# EAGLE board frankfurt_eth_rev_A (EAGLE 6.6.0)
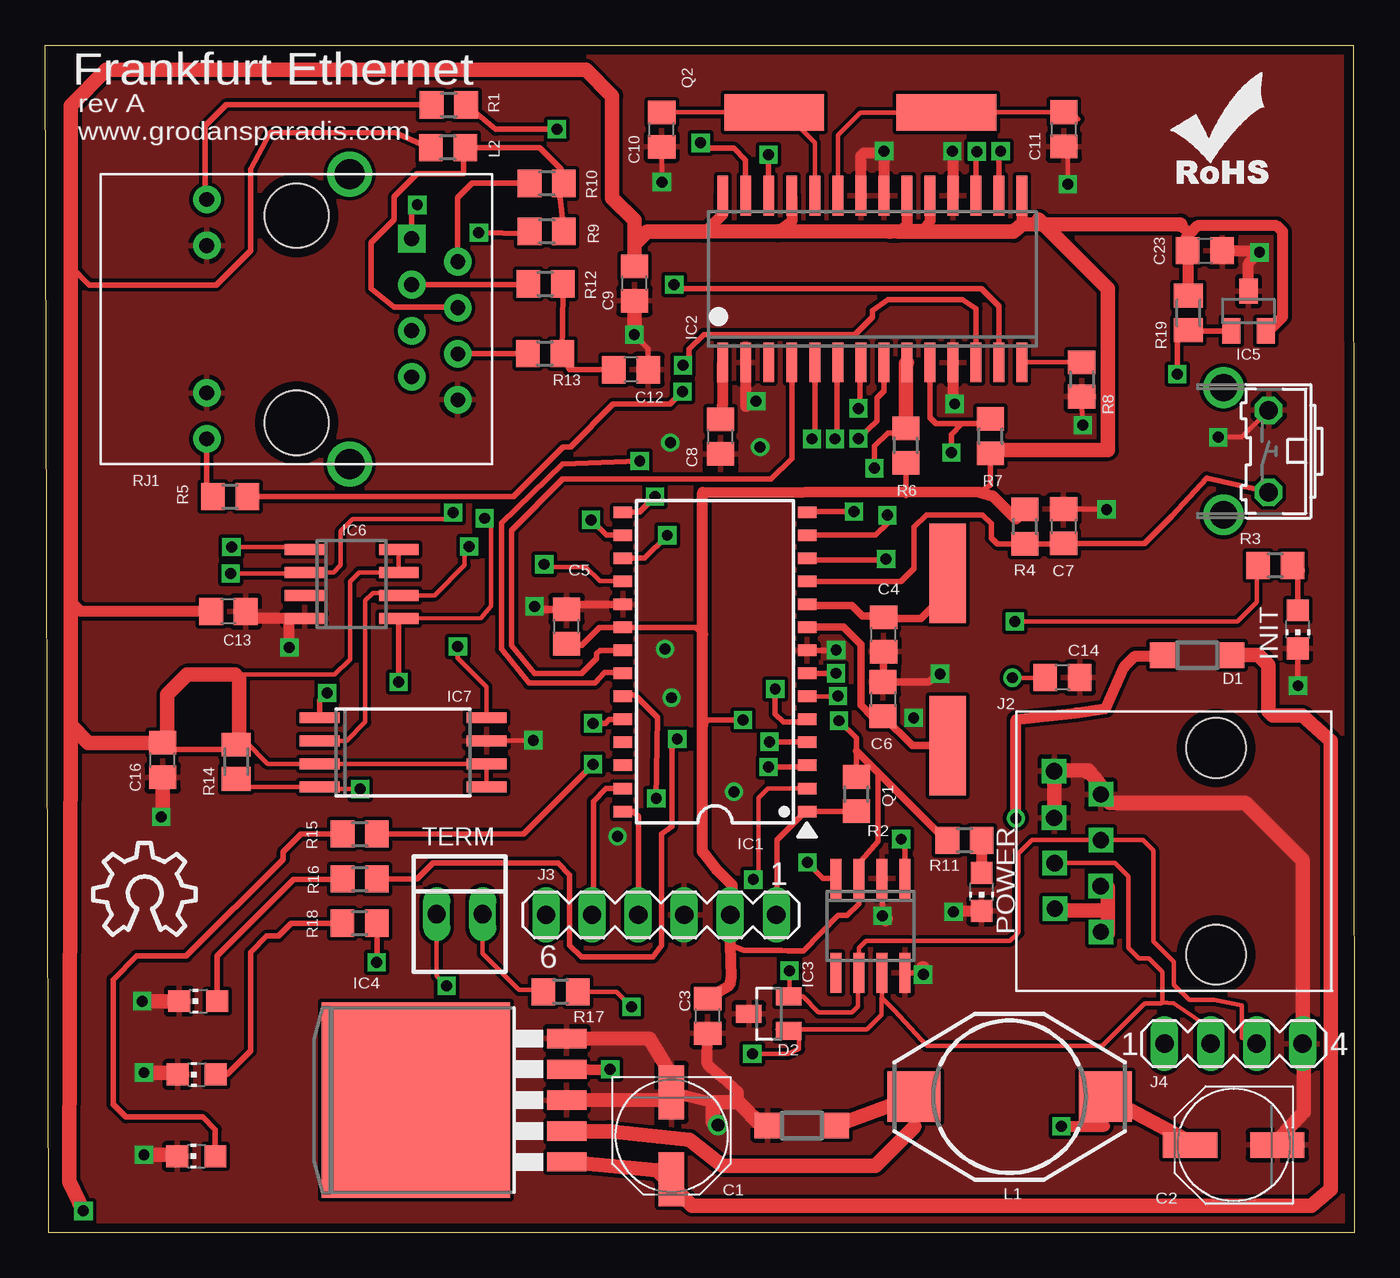
[diagram p0: board, top side]
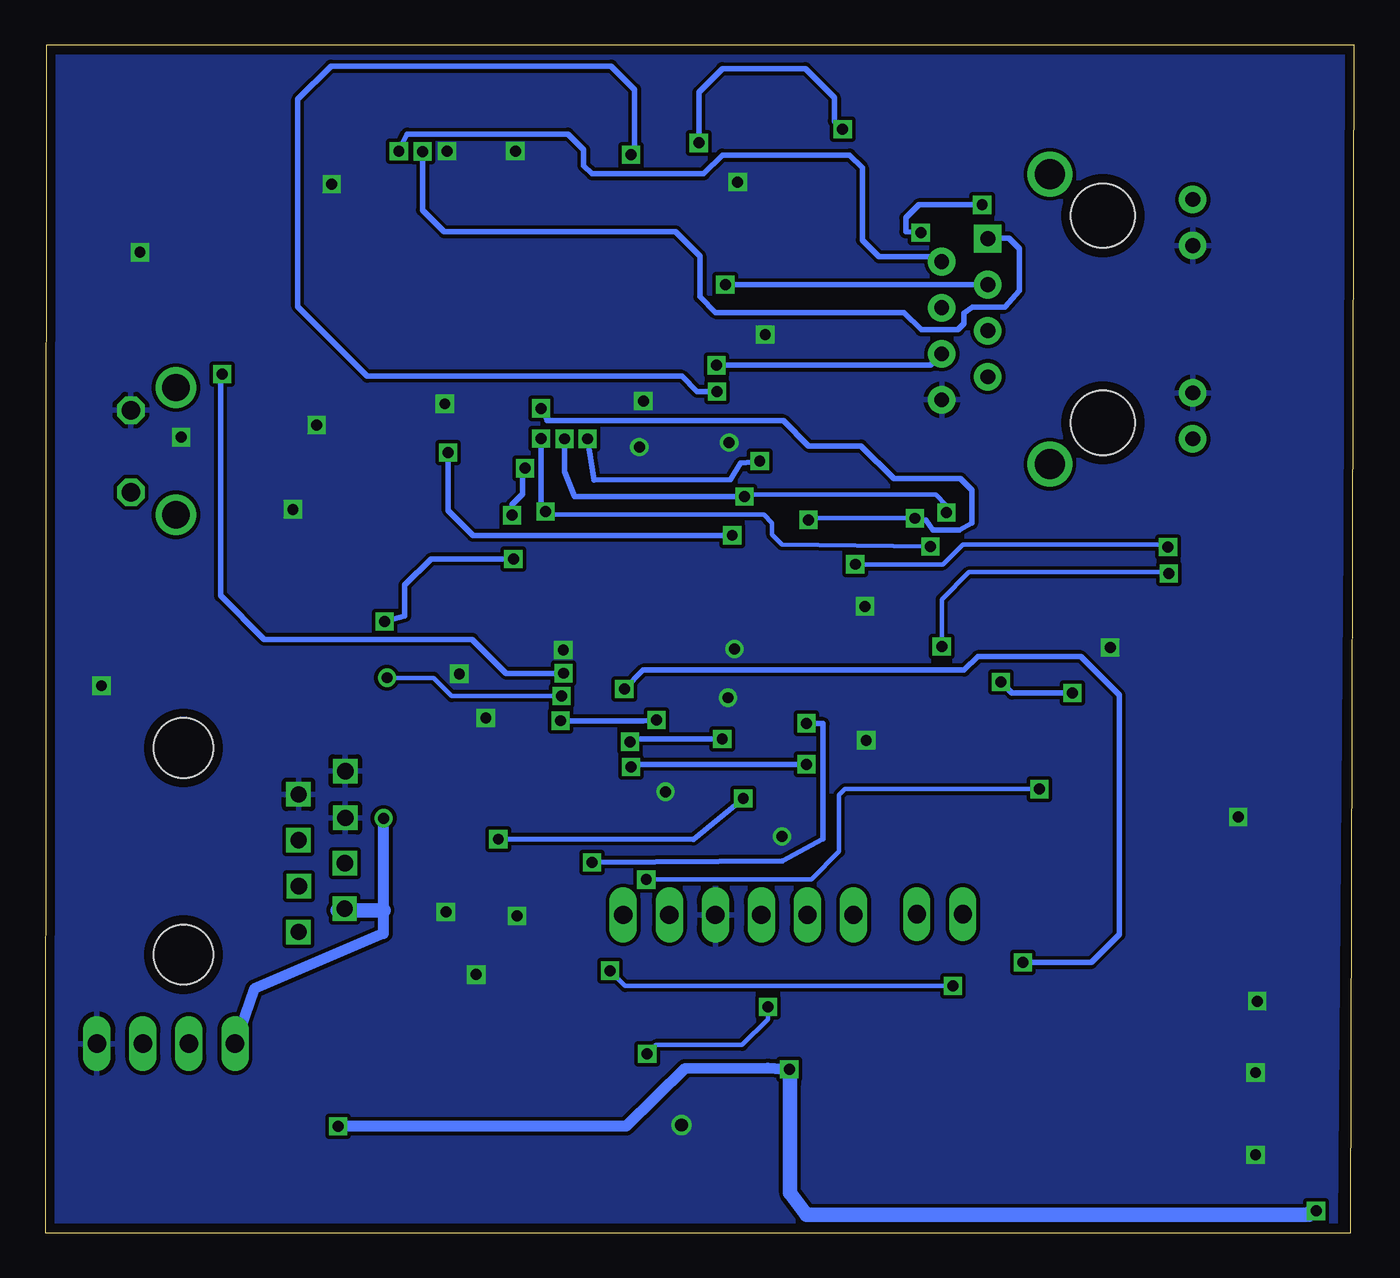
[diagram p1: board, bottom side, seen from below]

Size 72.2 x 65.5 mm. Coordinates in mm from the lower left corner, seen from the top.
Outline: 0.2,0 0,65.5 72.14,65.5 72.2,0 0.2,0
Copper layers (1*16): Top 0.035mm / dielectric 1.5mm / Bottom 0.035mm
Design rules "8mils": minimum track width 8mil, minimum drill 0.6mm, track to track 8mil, track to pad 8mil, pad to pad 8mil, via to via 8mil, smd to smd 0mil, copper to edge 20mil, drill to drill 10mil, minimum pad ring 8mil, minimum via ring 8mil, stop-mask expansion 0mil, vias tented up to drill 0mil, thermal gap 10mil

## Footprints (pad centres in the part's own frame; a part is rotated, then mirrored left to right if it is on the bottom)
PANASONIC_D = smd 3 x 1.4: + 2.4,0; - -2.4,0
0805 = smd 1.27 x 1.524: 1 -0.953,0; 2 0.953,0
C0805 = smd 1.3 x 1.5: 1 -0.95,0; 2 0.95,0
SOD123 = smd 1.4 x 1.4: A 1.9,0; C -1.9,0
SOT23 = smd 1 x 1.4: 1 -0.95,-1.1; 2 0.95,-1.1; 3 0,1.1
SO28 = smd 0.635 x 1.016: 1 -8.255,-5.08; 2 -6.985,-5.08; 3 -5.715,-5.08; 4 -4.445,-5.08; 5 -3.175,-5.08; 6 -1.905,-5.08; 7 -0.635,-5.08; 8 0.635,-5.08; 9 1.905,-5.08; 10 3.175,-5.08; 11 4.445,-5.08; 12 5.715,-5.08; 13 6.985,-5.08; 14 8.255,-5.08; 15 8.255,5.08; 16 6.985,5.08; 17 5.715,5.08; 18 4.445,5.08; 19 3.175,5.08; 20 1.905,5.08; 21 0.635,5.08; 22 -0.635,5.08; 23 -1.905,5.08; 24 -3.175,5.08; 25 -4.445,5.08; 26 -5.715,5.08; 27 -6.985,5.08; 28 -8.255,5.08
SO28W = smd 0.6 x 2.2: 1 -8.255,-4.6; 2 -6.985,-4.6; 3 -5.715,-4.6; 4 -4.445,-4.6; 5 -3.175,-4.6; 6 -1.905,-4.6; 7 -0.635,-4.6; 8 0.635,-4.6; 9 1.905,-4.6; 10 3.175,-4.6; 11 4.445,-4.6; 12 5.715,-4.6; 13 6.985,-4.6; 14 8.255,-4.6; 15 8.255,4.6; 16 6.985,4.6; 17 5.715,4.6; 18 4.445,4.6; 19 3.175,4.6; 20 1.905,4.6; 21 0.635,4.6; 22 -0.635,4.6; 23 -1.905,4.6; 24 -3.175,4.6; 25 -4.445,4.6; 26 -5.715,4.6; 27 -6.985,4.6; 28 -8.255,4.6
SO-08 = smd 0.6 x 2.2: 1 -1.905,-2.6; 2 -0.635,-2.6; 3 0.635,-2.6; 4 1.905,-2.6; 5 1.905,2.6; 6 0.635,2.6; 7 -0.635,2.6; 8 -1.905,2.6
TO263-5 = smd 1.067 x 2.159: 1 -3.404,-5.791; 2 -1.702,-5.791; 3 0,-5.791; 4 1.702,-5.791; 5 3.404,-5.791 | smd 10.8 x 10.41: 6 0,2.54
SO-8 = smd 0.6 x 2.2: 1 -1.905,-2.6; 2 -0.635,-2.6; 3 0.635,-2.6; 4 1.905,-2.6; 5 1.905,2.6; 6 0.635,2.6; 7 -0.635,2.6; 8 -1.905,2.6
SOP8W = smd 2.2 x 0.6: 1 -4.6,1.905; 2 -4.6,0.635; 3 -4.6,-0.635; 4 -4.6,-1.905; 5 4.6,-1.905; 6 4.6,-0.635; 7 4.6,0.635; 8 4.6,1.905
RJ-45 = drill 0.9 square: 1 -4.45,6.35; 2 -3.17,8.89; 3 -1.92,6.36; 4 -0.65,8.91; 5 0.62,6.35; 6 1.84,8.93; 7 3.14,6.35; 8 4.42,8.93 | hole 3.3: -5.7,0; 5.7,0
MA06-1 = drill 1.016 long: 1 -6.35,0; 2 -3.81,0; 3 -1.27,0; 4 1.27,0; 5 3.81,0; 6 6.35,0
MA04-1 = drill 1.016 long: 1 -3.81,0; 2 -1.27,0; 3 1.27,0; 4 3.81,0
DO3316P = smd 2.92 x 2.79: 1 -5.28,0; 2 5.28,0
R0805 = smd 1.3 x 1.5: 1 -0.95,0; 2 0.95,0
CHIP-LED0805 = smd 1.2 x 1.2: A 0,-1.05; C 0,1.05
9C = smd 5.5 x 2: P$1 -4.74,0; P$2 4.76,0
M0805 = smd 1.3 x 1.6: 1 -0.95,0; 2 0.95,0
HR911105A = drill 0.813 pad 1.524: G+ 4.953,-6.604; G- 4.953,-4.064; GND -8.89,4.445; NC -6.35,3.175; P4 -8.89,-0.635; P5 -6.35,0.635; RD+ -6.35,-1.905; RD- -8.89,1.905; TD- -8.89,-3.175; Y+ 4.953,6.604; Y- 4.953,4.064 | drill 1.651 pad 2.159: SHIELD0 -2.921,8.001; SHIELD1 -2.921,-8.001 | drill 0.813 pad 1.524 square: TD+ -6.35,-4.445 | hole 3.556: 0,-5.715; 0,5.715
B3F-31XX = drill 1.016 octagon: 1 -2.261,-1.245; 2 2.261,-1.245 | drill 1.499 pad 2.159: 3 -3.505,1.245; 4 3.505,1.245
22-23-2021 = drill 1 long: 1 -1.27,0; 2 1.27,0

## Placement (x,y rotation side)
C1  100uF  [PANASONIC_D]  34.54,5.34 270 top
C2  330uF  [PANASONIC_D]  65.56,4.84 180 top
C3  100nF  [0805]  36.54,11.96 90 top
C4  15pF  [C0805]  46.24,33 90 top
C5  0.1uF  [C0805]  28.75,33.44 90 top
C6  15pF  [C0805]  46.21,29.43 270 top
C7  0.1uF  [C0805]  56.17,38.97 270 top
C8  10uF  [C0805]  37.24,43.91 90 top
C9  0.1uF  [C0805]  32.5,52.36 90 top
C10  18pF  [C0805]  34,60.85 90 top
C11  18pF  [C0805]  56.19,60.86 90 top
C12  0.1uF  [C0805]  32.31,47.6 180 top
C13  0.1uF  [C0805]  10.1,34.27 180 top
C14  1 uF  [C0805]  56.11,30.62 180 top
C16  0.1uF  [C0805]  6.47,26.07 90 top
C23  0.1uF  [C0805]  63.97,54.17 0 top
D1  1N5819  [SOD123]  63.54,31.86 180 top
D2  NUP2105L  [SOT23]  39.91,12.08 90 top
D3  1N5819  [SOD123]  41.73,5.91 180 top
IC1  PIC18F26K80  [SO28]  36.94,31.49 90 top
IC2  ENC28J60-SO  [SO28W]  45.62,52.61 0 top
IC3  SN65HVD232  [SO-08]  45.51,16.93 180 top
IC4  LM2575S  [TO263-5]  22.97,7.31 90 top
IC5  11AA02E48  [SOT23]  66.37,50.84 0 top
IC6  MCP23A256  [SO-8]  16.9,35.79 270 top
IC7  AT45DB041D  [SOP8W]  19.73,26.5 0 top
J2  A00-108-220-450  [RJ-45]  64.58,21.04 90 top
J3  [MA06-1]  33.97,17.53 180 top
J4  [MA04-1]  65.55,10.43 0 top
L1  330 uH  [DO3316P]  53.19,7.5 0 top
L2  0.5A 60R  [R0805]  22.21,59.85 180 top
LED1  [CHIP-LED0805]  69.09,33.28 180 top
LED2  Red LED  [CHIP-LED0805]  51.65,18.8 180 top
LED3  [CHIP-LED0805]  8.33,4.22 90 top
LED4  [CHIP-LED0805]  8.43,12.77 90 top
LED5  [CHIP-LED0805]  8.35,8.73 90 top
Q1  10 MHz  [9C]  49.78,31.63 270 top
Q2  25 MHz  [9C]  44.95,61.8 0 top
R1  180  [R0805]  22.26,62.21 0 top
R2  10K  [R0805]  44.74,24.19 90 top
R3  1K  [R0805]  67.85,36.81 180 top
R4  10K  [R0805]  54.04,38.95 90 top
R5  180  [R0805]  10.2,40.6 0 top
R6  100K  [R0805]  47.47,43.43 90 top
R7  10K  [R0805]  52.14,43.94 90 top
R8  2K 1%  [R0805]  57.17,47.07 270 top
R9  49.9 1%  [R0805]  27.66,55.23 180 top
R10  49.9 1%  [R0805]  27.66,57.88 180 top
R11  1K  [R0805]  50.71,21.64 180 top
R12  49.9 1%  [R0805]  27.59,52.34 0 top
R13  49.9 1%  [R0805]  27.56,48.5 0 top
R14  100k  [M0805]  10.54,25.98 90 top
R15  1K  [R0805]  17.35,21.99 0 top
R16  1K  [R0805]  17.35,19.51 0 top
R17  120  [R0805]  28.42,13.29 180 top
R18  1K  [R0805]  17.34,17.08 0 top
R19  22K  [M0805]  63.06,50.74 270 top
RJ1  HR911105A  [HR911105A]  13.86,50.39 180 top
S1  [B3F-31XX]  66.24,43.11 90 top
TERM  22-23-2021  [22-23-2021]  22.86,17.57 0 top
U$1  [ROHS_SILK]  64.17,60.28 0 top
U$2  [OSHW_10X200_NOTEXT]  2.64,16.43 0 top

## Library data of the parts
C1 C2 C4-C14 C16 C23 L2 R1-R19 = rcl
C3 = cap-master
D1-D3 = diode
IC1 = pic_olin
IC2 = microchip_enet
IC3 = microchip_can
IC4 = v-reg-3
IC5 IC7 = snow
IC6 J2 Q1 Q2 = vscpcan
J3 J4 = con-lstb; OC_FARNELL: unknown; OC_NEWARK: unknown
L1 = inductor-coilcraft; OC_FARNELL: unknown; OC_NEWARK: unknown
LED1-LED5 = led
RJ1 = hr911105a
S1 = switch-omron; MPN: B3F-3100; OC_FARNELL: 959704; OC_NEWARK: 36M3582
TERM = con-molex; MF: MOLEX; MPN: 22-23-2021; OC_FARNELL: 1462926; OC_NEWARK: 25C3832
U$1 U$2 = seed_Logo

## Nets
+12V: D1.A J2.1 J2.2 J2.3 J4.1
CANL: D2.2 IC3.6 J2.5 J4.3 TERM.1
ETH_CS: IC1.13 IC2.9 R6.2
ETH_RESET: IC1.17 IC2.10 R7.2
EUI48: IC1.7 IC5.1 R19.2
GND: C1.- C2.- C3.1 C4.1 C5.2 C6.1 C7.1 C8.1 C9.1 C10.1 C11.1 C12.1 C13.1 C14.1 C16.1 C23.2 D2.3 D3.A IC1.8 IC1.19 IC2.2 IC2.11 IC2.18 IC2.21 IC2.22 IC3.2 IC3.8 IC4.3 IC4.5 IC5.3 IC6.4 IC7.7 J2.6 J2.7 J2.8 J3.3 J4.4 LED1.C LED2.C LED3.C LED4.C LED5.C R8.2 RJ1.G- RJ1.GND RJ1.Y- S1.2
INT0: IC1.21 IC2.4
INT1: IC1.22 IC2.5
IO2: IC1.25
IO3: IC1.26
IO4: IC1.27 J3.5
IO5: IC1.28 J3.4
LED_BUS_OFF: IC1.5 R18.2
LED_BUS_WARN: IC1.4 R16.2
LED_CONNECTED: IC1.3 R15.2
LEDA: IC2.27 R1.2
LEDB: IC2.26 R5.2
MISO: IC1.15 IC2.6 IC6.2 IC7.8
MOSI: IC1.16 IC2.7 IC6.5 IC7.1
N$1: D3.C IC4.2 L1.1
N$2: C4.2 IC1.10 Q1.P$1
N$3: C14.2 IC1.6
N$4: IC1.12 R3.2
N$5: LED1.A R3.1
N$6: C7.2 IC1.11 R4.1 S1.1
N$7: C6.2 IC1.9 Q1.P$2
N$8: R1.1 RJ1.G+
N$9: C8.2 IC2.1
N$10: R5.1 RJ1.Y+
N$11: R17.2 TERM.2
N$13: IC2.14 R8.1
N$14: LED3.A R15.1
N$15: C10.2 IC2.24 Q2.P$1
N$16: C11.2 IC2.23 Q2.P$2
N$17: C12.2 R12.2 R13.2
N$19: L2.1 R9.1 R10.1 RJ1.P4
N$20: LED2.A R11.1
N$21: LED4.A R16.1
N$22: D2.1 IC3.7 J2.4 J4.2 R17.1
N$24: LED5.A R18.1
RAM_CS: IC1.18 IC6.1
RESET: IC1.1 J3.1 R2.1
ROM_CS1: IC1.2 IC7.4 R14.1
RXCAN: IC1.24 IC3.4
SCK: IC1.14 IC2.8 IC6.6 IC7.2
TPIN+: IC2.13 R12.1 RJ1.RD+
TPIN-: IC2.12 R13.1 RJ1.RD-
TPOUT+: IC2.17 R9.2 RJ1.TD+
TPOUT-: IC2.16 R10.2 RJ1.TD-
TXCAN: IC1.23 IC3.1
VCC: C2.+ C3.2 C5.1 C9.2 C13.2 C16.2 C23.1 IC1.20 IC2.15 IC2.19 IC2.20 IC2.25 IC2.28 IC3.3 IC4.4 IC5.2 IC6.7 IC6.8 IC7.3 IC7.5 IC7.6 J3.2 L1.2 L2.2 R2.2 R4.2 R6.1 R7.1 R11.2 R14.2 R19.1
VIN2: C1.+ D1.C IC4.1
VREF: IC3.5

## Tracks (layer width: path | path; a pad name or v marks a point on that pad's centre or on a via)
+12V  (via drill 0.6)
  Top 0.203: J2.2 56.08,17.78 | 58.62,16.51 J2.1
  Top 0.305: 61.58,31.8 D1.A
  Top 0.61: v53.54,22.86 53.54,28.31 56.86,28.67 58.5,28.93 59.53,31.22 60.11,31.8 61.58,31.8
  Top 0.813: 56.08,17.78 58.62,17.78 | 58.62,17.78 58.62,19.05 J2.3 | 58.62,17.78 58.62,16.51
  Bottom 0.203: 56.08,17.78 J2.2
  Bottom 0.61: v53.54,22.86 53.54,17.78 53.54,16.51 60.67,13.44 J4.1
  Bottom 0.813: 53.54,17.78 56.08,17.78
CANL  (via drill 0.6)
  Top 0.203: 53.59,16.46 53.54,16.51
  Top 0.254: J4.3 66.01,10.75 66.01,12.53 64.49,12.83 63.1,12.83 62.26,13.67 62.26,14.93 61.12,16.07 61.12,21.09 60.55,21.66 J2.5 54.41,21.66 53.68,20.93 53.68,16.56 53.59,16.46 53.22,16.1 45.26,16.1 44.87,15.71 IC3.6 44.83,14.29 44.83,12.49 44.49,12.15 42.66,12.15 41.78,13.03 D2.2 41.05,13.07 v41.05,14.45 | TERM.1 21.59,14.16 v22.14,13.61
  Bottom 0.254: v22.14,13.61 40.21,13.61 v41.05,14.45
ETH_CS  (via drill 0.6)
  Top 0.305: IC1.13 45.8,38.48 46.45,39.13 v46.45,39.58 | v45.74,42.17 45.74,43.38 46.47,44.11 47.2,44.11 R6.2
  Top 0.813: R6.2 47.47,47.95 IC2.9
  Bottom 0.305: v46.45,39.58 46.45,40.17 45.88,40.74 45.88,42.03 v45.74,42.17
ETH_RESET  (via drill 0.6)
  Top 0.305: IC2.10 48.8,44.97 49.14,44.62 50.56,44.62 | 50.56,44.62 51.87,44.62 R7.2 | IC1.17 33.05,37.2 v34.31,38.47 | v49.98,43.04 49.98,44.04 50.56,44.62
  Bottom 0.305: v34.31,38.47 48.61,38.47 49.98,39.84 v49.98,43.04
EUI48  (via drill 0.6)
  Top 0.305: IC5.1 63.11,49.74 R19.2 62.45,49.18 v62.45,47.36 | IC1.7 v43.62,30.86
  Bottom 0.305: v43.62,30.86 46.78,30.86 48.65,32.73 60.12,32.73 62.53,35.14 62.53,47.28 v62.45,47.36
GND  (via drill 0.6, 0.7)
  Top 0.254: 36.83,7.18 36.83,7.36 | v64.7,43.88 65.99,43.88 S1.2 | v34.01,57.96 C10.1 | v56.4,57.84 56.4,59.7 C11.1 | R8.2 57.2,44.56 v57.23,44.55 | v26.92,27.16 24.36,27.16 IC7.7
  Top 0.305: IC3.8 48.34,14.33 v48.43,14.24 | v46.18,17.47 46.18,19.5 IC3.2 | LED1.C v69.1,30.17 | C7.1 58.52,39.92 v58.54,39.9 | IC1.8 43.47,32.12 v43.63,32.14 | C12.1 33.26,48.77 v32.49,49.54
  Top 0.406: IC1.19 29.02,34.66 C5.2 27.39,34.39 v26.99,34.55 | C4.1 46.24,30.41 C6.1 48.71,30.38 v49.36,30.83
  Top 0.61: 34.25,7.32 34.53,6.65 34.82,7.21 34.85,7.18 | 34.85,7.18 34.9,7.13 | 34.85,7.18 C1.- | 39.62,5.79 39.53,5.88 D3.A 39.68,5.91 | C1.- 36.83,7.18 | 39.68,5.91 39.78,5.81 | 39.68,5.91 39.13,6.46 | 34.64,7.15 34.54,7.05 | C1.- 34.64,7.15 | 34.67,8.45 34.67,7.18 34.64,7.15 | 36.83,6.09 v37.11,5.94 | 38.23,7.18 38.23,7.75 37.34,8.56 36.51,9.29 C3.1 | 50.15,17.75 LED2.C | IC2.2 38.64,45.58 v39.21,45.87 | IC2.11 50.07,45.81 v50.16,45.72 | v50.04,59.66 50.06,59.3 50.08,57.25 | 50.07,57.24 IC2.18 | IC2.21 46.27,57.23 v46.27,59.67 46.17,59.57 45.16,59.57 44.98,59.4 IC2.22 | C23.2 66.89,54.17 v66.98,54.08 66.37,53.47 IC5.3 | IC6.4 13.26,33.88 | 13.26,33.88 11.43,33.88 C13.1 | v13.46,32.28 13.46,33.69 13.26,33.88
  Top 0.813: IC4.3 34.25,7.32 | 39.53,5.88 38.23,7.18 36.83,7.18 36.83,6.09 | IC4.5 33.34,10.71 34.67,8.45 | C2.- 67.96,5.06 69.41,6.67 69.41,10.16 J4.4 69.36,20.54 66.2,23.7 58.71,23.7 J2.7 58.18,24.74 57.61,25.39 57.55,25.51 | 57.5,25.4 57.55,25.51 | 57.55,25.51 55.69,25.5 J2.8 J2.6 | 46.35,17.3 v46.18,17.47 | 48.4,14.57 v48.43,14.24 | C9.1 v32.5,49.55 v32.49,49.54 | C16.1 6.47,23.01 v6.39,22.93 | v5.34,12.77 LED4.C | v5.44,8.83 7.2,8.83 LED5.C | v5.44,4.29 7.21,4.29 LED3.C
  Bottom 0.305: J4.4 69.46,10.33
  other vias: 50.1,17.7 47.9,28.4 31.56,21.86 34.54,29.51 34.19,32.2 37.99,24.32 34.48,43.58 39.43,43.34
  pour Top: 0.56,64.93 0.48,64.75 0.81,0.36 71.78,0.36 71.78,0.49 71.66,0.49 71.66,65.17 0.81,65.17 0.59,65.16
  pour Bottom: 0.56,65.17 0.51,65.17 1.05,0.49 71.78,0.49 71.78,65.17 1.57,65.19 1.39,65.18
INT0
  Top 0.305: IC2.4 41.18,42.7 40.04,41.57 28.54,41.57 25.71,38.74 25.71,32.4 26.99,30.84 29.58,30.84 30.41,31.67 30.41,31.94 30.59,32.12 IC1.21
INT1  (via drill 0.6)
  Top 0.305: IC2.5 42.45,43.88 v42.29,43.79 | v32.79,42.56 28.52,42.41 25.16,39.15 25.16,32.19 26.68,30.32 30.31,30.32 30.86,30.91 31.8,30.91 IC1.22
  Bottom 0.305: v42.29,43.79 41.94,41.53 34.4,41.54 33.85,42.45 32.87,42.53 v32.79,42.56
IO4
  Top 0.305: IC1.27 30.93,24.5 30.23,23.8 30.23,17.6 J3.5
IO5
  Top 0.305: IC1.28 32.45,23.23 32.72,22.96 32.72,17.55 J3.4
LED_BUS_OFF  (via drill 0.6)
  Top 0.305: R18.2 18.29,14.93 v18.27,14.91 | v40.26,29.99 40.26,28.61 40.71,28.16 41.87,28.16 IC1.5
  Bottom 0.305: v18.27,14.91 14.5,14.91 12.96,16.45 12.96,29.66 15.08,31.78 20.77,31.78 21.52,31.03 39.22,31.03 v40.26,29.99
LED_BUS_WARN  (via drill 0.6)
  Top 0.305: R16.2 20.5,19.51 21.39,20.4 28.27,20.4 28.92,19.75 28.92,15.86 29.57,15.21 33.51,15.21 34,15.86 34,22 34.56,22.4 34.56,26.93 v34.86,27.23 | v39.94,27.08 41.98,27.08 IC1.4
  Bottom 0.305: v34.86,27.23 39.79,27.23 v39.94,27.08
LED_CONNECTED  (via drill 0.6)
  Top 0.305: R15.2 26.37,21.99 v30.22,25.84 | v39.89,25.69 41.94,25.69 IC1.3
  Bottom 0.305: v30.22,25.84 39.74,25.84 v39.89,25.69
LEDA  (via drill 0.6)
  Top 0.305: IC2.27 38.64,59.17 37.99,59.82 36.45,59.82 v36.15,60.12 | v28.22,60.87 24.85,60.87 R1.2
  Bottom 0.305: v36.15,60.12 36.15,62.91 34.85,64.21 30.27,64.21 28.67,62.61 28.67,61.32 v28.22,60.87
LEDB  (via drill 0.6)
  Top 0.305: R5.2 25.82,40.6 28.57,43.35 28.96,43.35 31.31,45.7 34.45,45.7 v35.15,46.4 | v39.89,59.47 39.89,57.23 IC2.26
  Bottom 0.305: v35.15,46.4 36.24,46.4 37.09,47.25 54.44,47.25 58.28,51.09 58.28,62.52 56.44,64.36 40.99,64.36 39.69,63.06 39.69,59.67 v39.89,59.47
MISO  (via drill 0.6)
  Top 0.254: v22.49,39.73 22.29,39.36 16.95,39.36 16.3,38.71 16.3,36.82 15.9,36.42 IC6.2 14.23,36.36 v10.22,36.36 | IC7.8 24.33,30.11 22.75,31.69 v22.75,32.34
  Top 0.305: IC1.15 32.77,39.74 v33.63,40.61 | v43.56,43.79 43.68,43.79 43.68,47.97 IC2.6
  Bottom 0.254: v22.49,39.73 22.49,40.12 23.08,40.71 33.53,40.71 v33.63,40.61 | v22.75,32.34 22.75,34.93 21.24,36.44 10.62,36.44 v10.22,36.36
  Bottom 0.305: v33.63,40.61 43.02,40.61 43.55,41.99 v43.56,43.79
MOSI  (via drill 0.6)
  Top 0.254: IC6.5 24.04,33.91 24.58,34.57 24.58,39.06 v24.23,39.41
  Top 0.305: IC1.16 30.95,38.48 v30.1,39.32 | v44.85,45.47 44.92,45.85 44.95,46.21 44.95,47.98 IC2.7 | IC7.1 15.13,29.36 v15.54,29.77 | v19.49,30.38 IC6.5
  Bottom 0.254: v24.23,39.41 30.01,39.41 v30.1,39.32
  Bottom 0.305: v44.85,45.47 44.53,44.79 31.49,44.79 30.1,43.4 27.2,43.4 25.39,41.59 21.71,41.59 21.1,40.98 21.1,39.14 21.79,38.76 23.23,38.76 23.63,39.31 24.13,39.31 v24.23,39.41 | v15.54,29.77 18.88,29.77 v19.49,30.38
N$1
  Top 0.61: 48.03,5.86 47.98,5.91 L1.1 47.91,5.81 | IC4.2 29.35,5.65 29.23,5.59
  Top 0.813: L1.1 D3.C | 47.91,5.81 45.8,3.7 37.36,3.7 35.55,5.11 31.12,5.6 28.81,5.6 29.35,5.65
N$2
  Top 0.406: Q1.P$1 49.78,35.37 48.3,33.89 45.86,33.89 45.72,34.03 | 45.72,34.03 46.16,34.03 C4.2 | 45.72,34.03 45.07,34.03 44.5,34.6 42.09,34.6 IC1.10
N$3  (via drill 0.6)
  Top 0.254: IC1.6 43.72,29.59 v43.72,29.6 | v53.35,30.61 C14.2
  Bottom 0.254: v43.72,29.6 49.78,29.6 50.78,30.6 v53.34,30.6 v53.35,30.61
N$4  (via drill 0.6)
  Top 0.254: v53.48,33.72 65.76,33.72 66.82,34.78 66.82,36.73 R3.2
  Top 0.305: IC1.12 42.12,37.2 42.21,37.12 46.34,37.12 v46.38,37.16
  Bottom 0.305: v46.38,37.16 50.93,37.16 52.37,35.72 52.37,34.03 v53.48,33.72
N$5
  Top 0.305: LED1.A 69.09,36.52
  Top 0.813: 69.09,36.52 R3.1
N$6
  Top 0.305: IC1.11 42.04,35.92 47.19,35.92 47.91,36.64 47.91,38.92 48.59,39.6 51.69,39.6 52.18,39.11 52.18,38.33 52.51,38 R4.1 56.15,38 C7.2 60.63,38.02 62.15,39.54 64.07,41.63 S1.1
N$7
  Top 0.406: Q1.P$2 47.82,26.87 C6.2 45.61,28.48 44.98,29.11 44.98,32.45 44.03,33.4 IC1.9
N$8
  Top 0.305: R1.1 9.97,62.21 8.83,61.07 8.83,57.07 RJ1.G+
N$9
  Top 0.61: C8.2 37.38,45.78 IC2.1
N$10
  Top 0.305: RJ1.Y+ 8.91,40.54 R5.1
N$11
  Top 0.254: TERM.2 24.13,15.4 26.14,13.39 27.37,13.39 R17.2
N$13
  Top 0.254: IC2.14 54.05,48.01 54.06,48.02 R8.1 | R8.1 57.59,48.02 57.77,47.84 57.35,47.84 R8.1
N$14
  Top 0.305: LED3.A 9.38,5.68 8.68,6.38 4.44,6.38 3.74,7.08 3.74,13.96 5.04,15.26 7.78,15.26 13.12,20.6 13.12,21.01 14.11,22 R15.1
N$15
  Top 0.254: IC2.24 42.45,60.12 40.95,61.61 40.4,61.61 Q2.P$1 C10.2
N$16
  Top 0.254: C11.2 56.57,61.43 56.99,61.43 56.62,61.8 Q2.P$2 44.96,61.79 43.72,60.55 IC2.23
N$17
  Top 0.305: C12.2 28.91,47.6 R13.2 28.56,51.92 R12.2
N$19
  Top 0.305: R9.1 28.31,57.83 R10.1 28.46,57.98 28.46,58.66 27.27,59.85 L2.1 23.06,59.69 23.06,58.42 20.52,58.42 19.25,57.15 19.25,55.88 17.98,54.61 17.98,52.07 19.25,51.06 23.06,51.06 RJ1.P4
N$20
  Top 0.61: R11.1 LED2.A
N$21
  Top 0.305: LED4.A 9.48,15.27 13.71,19.5 R16.1
N$22  (via drill 0.6)
  Top 0.254: 46.15,12.95 IC3.7 | 46.15,12.95 46.81,12.28 48.63,10.3 58.3,10.3 60.66,12.66 61.57,12.66 61.61,12.7 | 61.61,12.7 61.61,14.38 60.86,15.13 60.32,15.13 59.73,15.72 59.73,19.66 59,20.39 J2.4 | 61.61,12.7 62.25,12.66 63.98,11.47 J4.2 | 46.15,12.95 46.13,12.93 46.13,12.03 45.32,11.22 40.39,11.22 D2.1 41.58,11.18 41.58,10.14 40.96,9.86 v39,9.86 | R17.1 31.51,13.29 v32.34,12.46
  Top 0.305: IC3.7 46.12,14.3
  Bottom 0.254: v32.34,12.46 32.34,11.78 33.76,10.36 38.5,10.36 v39,9.86
N$24
  Top 0.305: LED5.A 10.02,8.73 11.32,10.03 11.32,15.46 12.22,16.36 12.86,16.36 13.56,17.06 16.37,17.06 R18.1
RAM_CS  (via drill 0.6)
  Top 0.254: IC1.18 30.59,35.94 29.81,36.72 27.67,36.72 v27.52,36.87 | v10.27,37.82 14.17,37.82 IC6.1
  Bottom 0.254: v27.52,36.87 22.69,36.87 21.59,37.97 10.42,37.97 v10.27,37.82
RESET
  Top 0.305: IC1.1 R2.1 41.94,23.24 40.36,21.66 40.36,17.57 J3.1
ROM_CS1  (via drill 0.6)
  Top 0.254: R14.1 10.97,24.59 IC7.4 15.25,24.47 v17.36,24.47 | IC1.2 39.88,24.5 39.34,23.97 39.34,19.77 v39.05,19.48
  Bottom 0.254: v39.05,19.48 29.95,19.48 28.41,21.02 28.41,24.14 28.08,24.47 v17.36,24.47
RXCAN  (via drill 0.6)
  Top 0.305: IC3.4 42.91,19.53 v42.04,20.43 | v30.21,28.1 30.9,28.1 31.1,28.3 31.84,28.3 IC1.24
  Bottom 0.305: v42.04,20.43 31.54,20.51 29.3,21.72 29.3,28.09 v30.21,28.1
SCK  (via drill 0.6)
  Top 0.254: IC6.6 20.02,35.16 | 20.02,35.16 21.46,35.16 23.13,36.82 23.13,37.72 v23.38,37.85 | IC7.2 16.61,27.14 17.65,28.17 17.65,34.86 18.08,35.29 19.88,35.29 20.02,35.16
  Top 0.305: IC2.8 46.26,46.41 45.87,46.03 45.87,44.77 v44.85,43.8 | v44.6,39.78 42.05,39.78 IC1.14
  Bottom 0.254: v23.38,37.85 31.57,37.97 32.11,38.51 32.11,39.16 32.56,39.61 44.43,39.61 v44.6,39.78
  Bottom 0.305: v44.85,43.8 44.85,40.17 v44.6,39.78
TPIN+  (via drill 0.6)
  Top 0.305: RJ1.RD+ 26.13,52.3 R12.1 | IC2.13 52.61,51.12 51.64,52.09 34.9,52.09 v34.69,52.3
  Bottom 0.305: v34.69,52.3 RJ1.RD+
TPIN-  (via drill 0.6)
  Top 0.305: RJ1.RD- 26.09,48.48 R13.1 | IC2.12 51.34,50.98 50.58,51.47 46.49,51.47 45.62,50.87 45.62,50.51 44.66,49.55 36.33,49.55 35.52,48.74 35.52,48.19 v35.18,47.85
  Bottom 0.305: v35.18,47.85 23.38,47.85 RJ1.RD-
TPOUT+  (via drill 0.6)
  Top 0.305: RJ1.TD+ 20.21,56.39 v20.52,56.7 | v23.91,55.17 26.59,55.11 R9.2 | IC2.17 51.34,59.55 v51.39,59.64
  Bottom 0.305: v20.52,56.7 24.02,56.7 24.74,55.98 24.74,55.21 v23.91,55.17 | v51.39,59.64 51.39,56.41 50.19,55.21 37.43,55.21 36.1,53.88 36.1,51.63 35.23,50.76 24.83,50.76 23.88,49.81 21.85,49.81 21.52,50.14 21.52,50.72 21.06,51.07 19.27,51.07 18.48,51.97 18.48,54.29 19.06,54.87 20.18,54.87 RJ1.TD+
TPOUT-  (via drill 0.6)
  Top 0.305: RJ1.TD- 22.75,57.09 23.55,57.89 26.45,57.89 R10.2 | IC2.16 52.61,59.65 v52.7,59.66
  Bottom 0.305: v52.7,59.66 52.6,59.9 52.24,60.61 43.37,60.61 42.5,59.74 42.5,58.87 42.04,58.41 35.88,58.41 34.85,59.44 27.83,59.44 27.13,58.74 27.13,54.76 26.21,53.84 23.02,53.84 RJ1.TD-
TXCAN  (via drill 0.6)
  Top 0.305: IC3.1 47.42,21.5 v47.21,21.71 | v33.7,23.96 33.76,28.41 32.52,29.65 31.93,29.65 IC1.23
  Bottom 0.305: v47.21,21.71 36.45,21.7 v33.7,23.96
VCC  (via drill 0.6)
  Top 0.203: 49.73,21.59 R11.2 | 44.74,26.67 44.75,26.57
  Top 0.254: IC6.8 IC6.7 17.3,36.42 16.8,35.92 16.8,31.63 15.95,30.78 10.47,30.78 10.27,30.78 | 8.97,34.09 C13.2 | IC7.5 IC7.6 IC7.3 12.27,25.86 11.05,27.09 10.7,27.09
  Top 0.305: C5.1 28.85,32.39 29.58,32.39 30.59,33.4 IC1.20 35.88,33.4 36.26,33.02 | 37.88,17.63 J3.2 | v31.16,9.01 31.16,8.96 | 37.78,15.87 38.53,15.56 40.62,15.56 40.98,15.55 41.83,15.55 43.71,17.5 44.23,17.5 44.88,18.14 IC3.3 44.84,20.32 45.92,21.59 45.92,25.4 | 58.43,5.87 L1.2 | R2.2 44.74,26.67 44.74,27.28 v43.78,28.24 43.78,28.14 | R6.1 47.47,40.65 47.48,40.87 | R7.1 52.14,41.25 51.53,40.85 | v38.49,28.29 36.55,28.29 36.25,27.99 | L2.2 21.16,59.85 19.29,60.68 12.41,60.68 11.32,58.68 11.32,54.18 9.42,52.28 2.43,52.28 1.4,53.31 | R14.2 10.36,26.67 6.55,26.67 C16.2 | 54.81,55.88 54.81,55.63
  Top 0.406: 63.25,4.95 C2.+ | 44.75,26.57 45.92,25.4 49.73,21.59
  Top 0.61: 36.24,21.04 37.01,20.03 37.1,19.96 37.88,19.18 37.88,17.63 | 31.16,8.96 IC4.4 | C3.2 37.73,13.65 37.83,14.12 37.78,15.87 J3.2 | v56.05,5.87 58.43,5.87 | 36.25,21.01 36.25,27.99 36.26,33.02 36.26,40.84 47.48,40.87 51.53,40.85 52.27,40.64 53.54,39.37 R4.2 | IC2.28 37.37,56.16 36.43,55.23 | 36.43,55.23 36.41,55.21 36.35,55.21 36.43,55.23 | 32.52,54.55 32.52,53.33 C9.2 | IC2.25 41.18,55.78 40.44,55.24 | IC2.20 47.53,55.56 47.05,55.22 46.78,55.22 46.54,55.23 46.63,55.21 | IC2.19 48.8,55.74 48.44,55.28 | IC2.15 53.88,55.62 | IC5.2 67.46,49.74 68.25,50.53 68.25,55.23 67.93,55.55 63.56,55.55 63.12,55.11 | 63.12,55.11 62.92,54.91 62.92,54.27 C23.1 63.06,54.13 R19.1 | 62.62,55.62 63.12,55.11 | C13.2 1.95,34.27 1.4,34.82
  Top 0.813: L1.2 63.25,4.95 | 36.35,55.21 33.18,55.21 32.52,54.55 | 36.43,55.23 40.44,55.24 46.54,55.23 | 48.44,55.28 46.63,55.21 | 47.05,55.22 53.41,55.22 53.88,55.62 54.81,55.63 62.62,55.62 | C9.2 32.5,55.85 31.27,57.08 31.27,62.7 29.83,64.14 3.37,64.14 1.4,62.17 1.4,53.31 1.4,34.82 1.4,28 | 1.4,28 1.32,2.84 v2.1,1.2 | 10.7,27.09 10.7,30.55 10.47,30.78 | 1.4,28 2.38,27.02 C16.2 6.73,27.28 6.73,29.68 7.83,30.78 10.27,30.78 | 54.81,55.88 58.62,52.07 58.62,43.18 52.27,43.18 R7.1
  Bottom 0.305: v43.78,28.24 39.24,28.24 v38.49,28.29
  Bottom 0.61: v31.16,9.01 32.34,9.09 36.91,9.06 40.16,5.87 v56.05,5.87 | v2.1,1.2 2.45,1.2 2.65,1
  Bottom 0.813: v31.16,9.01 31.12,8.25 31.12,2.2 30.2,1 2.65,1 2.5,1 v2.1,1.2
VIN2
  Top 0.406: 34.55,3.36 C1.+
  Top 0.813: IC4.1 33.73,3.44 | 33.73,3.44 34.55,3.36 | D1.C 66.92,31.86 67.45,31.33 67.45,28.78 67.7,28.53 69.33,28.53 70.9,27.13 70.9,2.39 69.83,1.49 35.68,1.49 33.73,3.44

## Text on the board
tNames: Frankfurt Ethernet | rev A | www.grodansparadis.com | INIT | POWER
tDocu: CONNECTED | BUS WARN | BUS OFF